# Allegro board pc042b_vsupply5v_07.brd
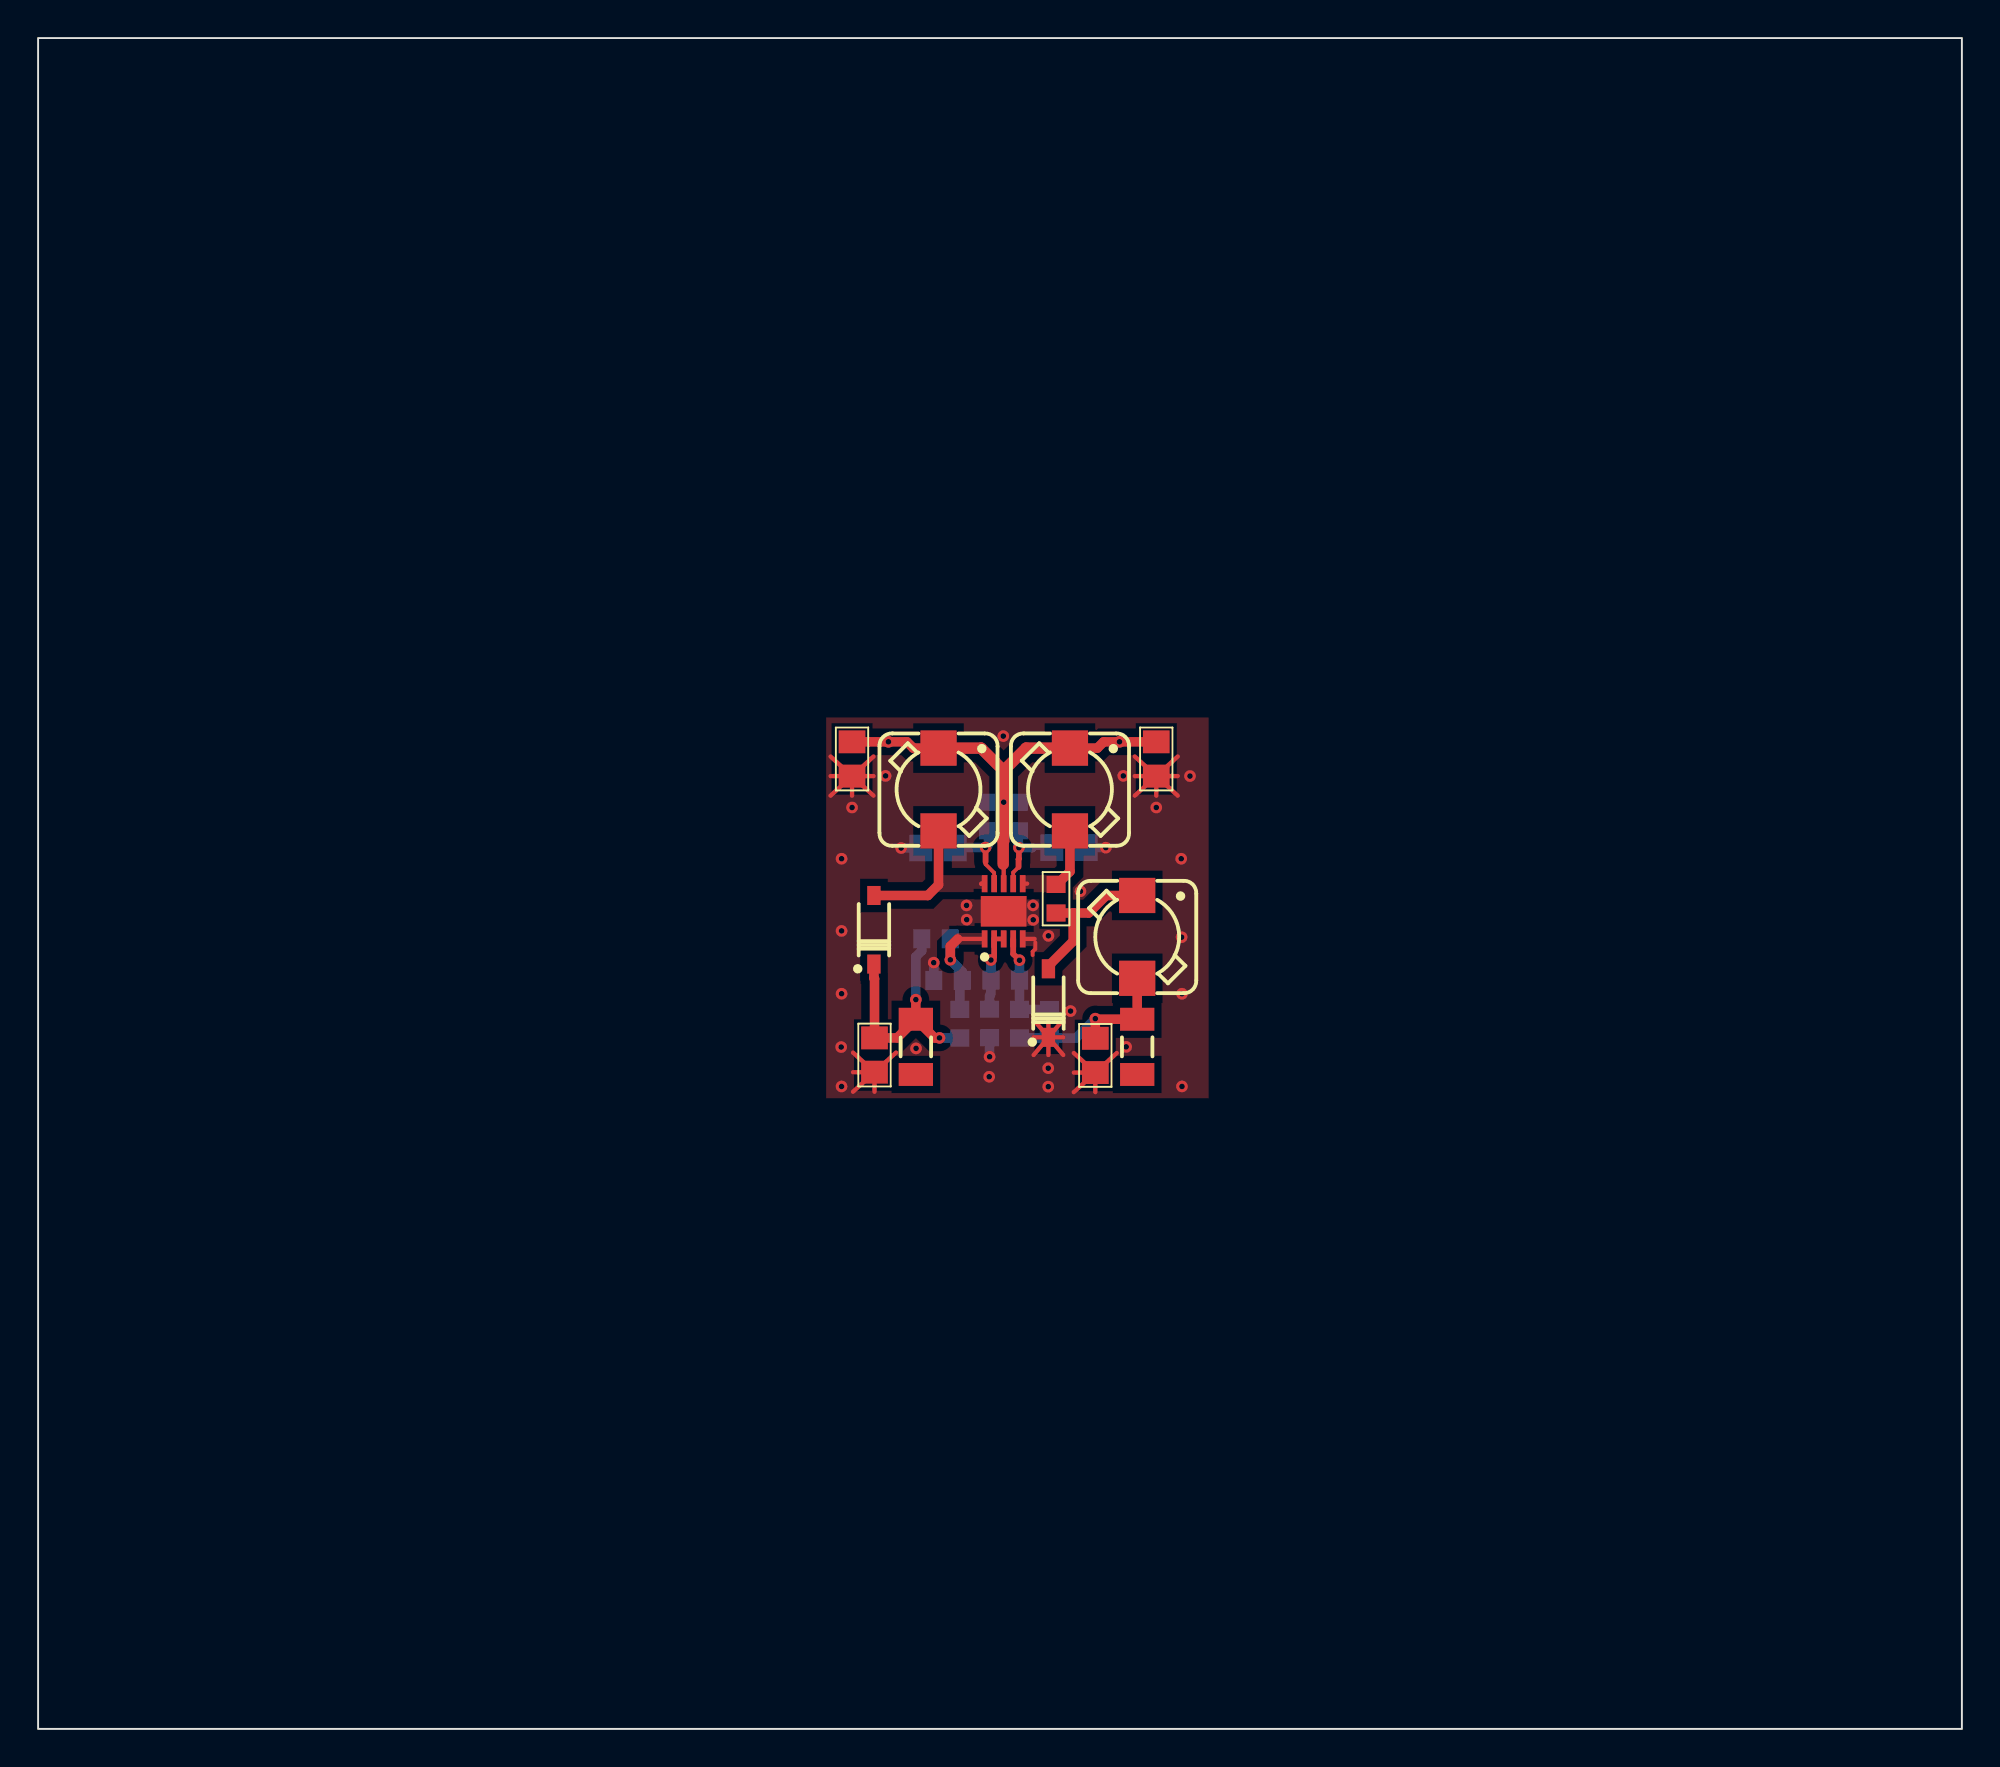
[diagram p0: board, top side]
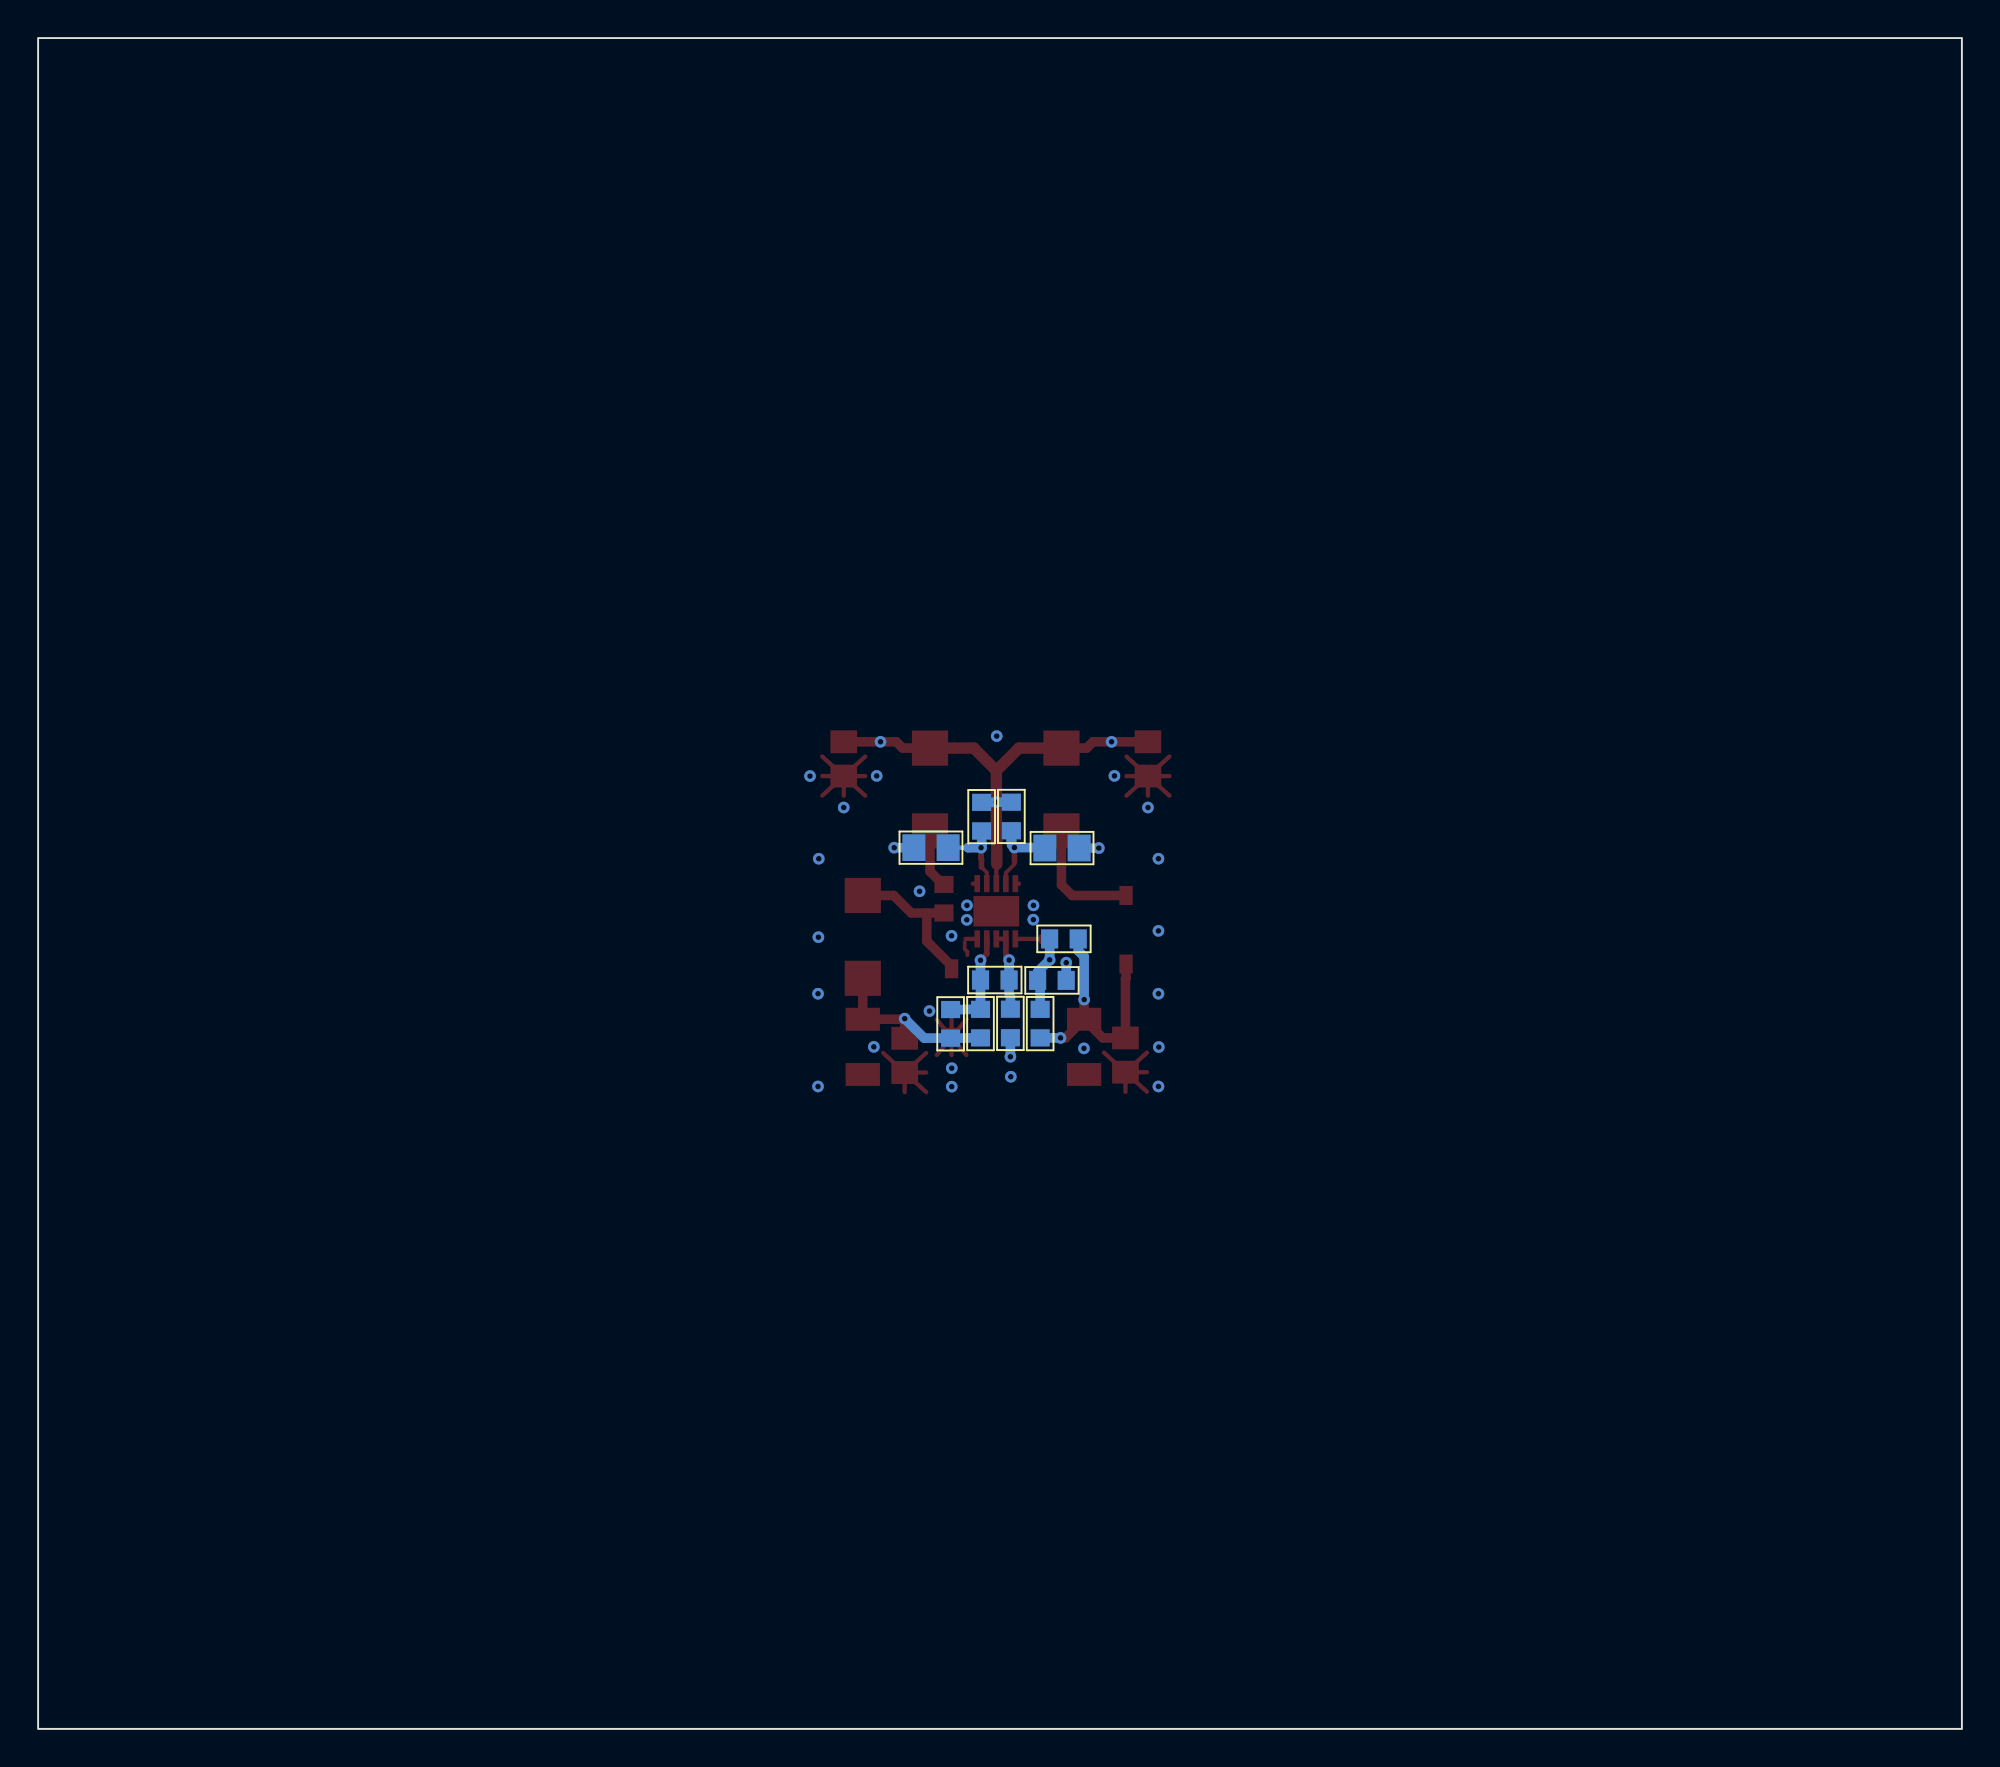
[diagram p1: board, bottom side, seen from below]

Outline 100.99 x 88.8 mm; copper layers: TOP, L2, L3, L4, L5, BOTTOM. Coordinates in mm from the lower left corner of the outline.
Outline path: rectangle 0,0 100.99,88.8

## Placement (name value [footprint] x y rotation side)
C1  4.7uF  [C0805]  58.7 50.94 90 top
C2  330nF  [C0805]  47.24 46.26 0 bottom
C3  330nF  [C0805]  54.12 46.28 180 bottom
C4  100nF  [C0603]  49.95 37.05 90 bottom
C5  1uF  [C0603]  53.44 43.6 270 top
C6  33pF  [C0603]  47.14 41.49 0 bottom
C7  10uF  [C0805]  55.5 35.37 90 top
C8  4.7uF  [C0805]  43.91 35.39 90 top
C9  68pF  [C0603]  53.09 37.03 90 bottom
C14  4.7uF  [C0805]  42.73 50.94 90 top
D1  -  [SOD3715X145N]  43.88 41.97 90 top
D2  -  [SOD3715X145N]  53.04 38.12 90 top
IC1  -  [SON50P300X300X100-11N-R240X160]  50.69 42.94 90 top
L1  10uH  [IND_WURTH_XS]  47.27 49.33 270 top
L2  10uH  [IND_WURTH_XS]  54.17 49.33 270 top
L3  10uH  [IND_WURTH_XS]  57.7 41.59 270 top
L4  -  [INDC3216X130N]  46.08 35.82 270 top
L5  -  [INDC3216X130N]  57.7 35.82 270 top
NOREF  -  []  -47.45 -107.93 0 top
R1  4.7k  [C0603]  51.46 47.91 270 bottom
R2  4.7k  [C0603]  49.9 47.92 270 bottom
R3  20k  [C0603]  50.77 39.33 180 bottom
R4  110k  [C0603]  51.52 37.04 90 bottom
R5  90k9  [C0603]  48.39 37.04 90 bottom
R6  20k  [C0603]  47.77 39.31 0 bottom

## Library data of the parts
C1 C8 C14 = CAPCERSMDCL2: part number: CAPCERSMDCL2_0805-4.7UF,10V; tolerance: +80%-20%
C2 C3 = CAPCERSMDCL2: part number: CAPCERSMDCL2_0805-330NF,50V; tolerance: 10%
C4 = CAPCERSMDCL2: part number: CAPCERSMDCL2_0603-100NF,16V; tolerance: 10%
C5 = CAPCERSMDCL2: part number: CAPCERSMDCL2_0603-1UF,16V; tolerance: 10%
C6 = CAPCERSMDCL1: part number: CAPCERSMDCL1_0603-33PF,50V; tolerance: 5%
C7 = CAPCERSMDCL2: part number: CAPCERSMDCL2_0805-10UF,10V_GEN; tolerance: 10%
C9 = CAPCERSMDCL1: part number: CAPCERSMDCL1_0603-68PF,50V; tolerance: 5%
D1 D2 = DIODE: part number: DIODE_SCHOTTKY_CA-SD101AW
IC1 = LT3471: part number: LT3471EDD#PBF
L1-L3 = INDUCTANCE: part number: INDUCTANCE_XS-10UH_25%
L4 L5 = FERRITE: part number: FERRITE_SMD-7427921,WURTH
R1 R2 = RSMD0603: part number: RSMD0603_1/16W-4K7,5%; tolerance: 5%
R3 R6 = RSMD0603: part number: RSMD0603_1/16W-20K,1%; tolerance: 1%
R4 = RSMD0603: part number: RSMD0603_100MW-110K,0.1%; tolerance: 0.1%
R5 = RSMD0603: part number: RSMD0603_1/16W-90K9,1%; tolerance: 1%

## Footprints (pads in the part's own frame, mm; a bottom-side part is the same pattern mirrored in y, then rotated)
C0603
  rect 0.9x1 smd: 1(-0.75,0) 2(0.75,0)
C0805
  rect 1.2x1.4 smd: 1(-0.9,0) 2(0.9,0)
IND_WURTH_XS
  rect 1.85x1.9 smd: 1(-2.18,0) 2(2.17,0)
INDC3216X130N
  rect 1.2x1.8 smd: 1(-1.45,0) 2(1.45,0)
SOD3715X145N
  rect 1x0.7 smd: A(1.8,0) C(-1.8,0)
SON50P300X300X100-11N-R240X160
  rect 0.9x0.3 smd: 1(-1.45,1) 2(-1.45,0.5) 3(-1.45,0) 4(-1.45,-0.5) 5(-1.45,-1) 6(1.45,-1) 7(1.45,-0.5) 8(1.45,0) 9(1.45,0.5) 10(1.45,1)
  rect 1.6x2.4 smd: 11(0,0)

## Nets
GND_SIGNAL: C1.1(A<0>) C2.1(A<0>) C3.1(A<0>) C4.1(A<0>) C7.1(A<0>) C8.1(A<0>) C14.1(A<0>) D2.C(K<0>) IC1.5(FB2*) IC1.11 R6.1(A<0>)
VIN: C1.2(B<0>) C14.2(B<0>) IC1.8(VIN) L1.1(A<0>) L2.1(A<0>) R1.1(A<0>) R2.1(A<0>)
+VOUT: L4.2(B)
-VOUT: L5.2(B)
UNNAMED_1_CAPCERSMDCL1_I12_B: C6.2(B<0>) IC1.1(FB1*) R5.2(B<0>) R6.2(B<0>)
UNNAMED_1_CAPCERSMDCL1_I13_B: C9.2(B<0>) IC1.4(FB2) R3.1(A<0>) R4.2(B<0>)
UNNAMED_1_CAPCERSMDCL2_I9_B: C2.2(B<0>) IC1.9(SHDN/SS1*) R2.2(B<0>)
UNNAMED_1_CAPCERSMDCL2_I10_B: C3.2(B<0>) IC1.7(SHDN/SS2*) R1.2(B<0>)
UNNAMED_1_CAPCERSMDCL2_I11_A: C5.1(A<0>) IC1.6(SW2) L2.2(B<0>)
UNNAMED_1_CAPCERSMDCL2_I11_B: C5.2(B<0>) D2.A(A<0>) L3.1(A<0>)
UNNAMED_1_CAPCERSMDCL2_I15_B: C6.1(A<0>) C8.2(B<0>) D1.C(K<0>) L4.1(A) R5.1(A<0>)
UNNAMED_1_CAPCERSMDCL2_I17_B: C4.2(B<0>) IC1.2(FB1) IC1.3(VREF) R3.2(B<0>)
UNNAMED_1_CAPCERSMDCL2_I20_B: C7.2(B<0>) C9.1(A<0>) L3.2(B<0>) L5.1(A) R4.1(A<0>)
UNNAMED_1_DIODE_I48_A: D1.A(A<0>) IC1.10(SW1) L1.2(B<0>)

## Via types
v1: diameter 0.61, hole 0.3, TOP to BOTTOM, 42 vias

## Routing (per net, layer and track width the routed paths; a pad name or vN(x,y) marks a point on that pad's centre or on a via; arc(x,y) is an arc through that point)
GND_SIGNAL: length 45.8
  TOP w0.2: 52.35,41.31 52.35,40.96 52.21,40.82 52.21,40.64
  TOP w0.226: 52.26,35.39 D2.C ; D2.C 52.26,37.25 ; D2.C 53.82,37.25 ; D2.C 53.82,36.32 ; D2.C 53.04,35.39 ; D2.C 52.26,36.32 ; D2.C 53.82,35.39 ; D2.C 53.04,37.25 ; 42.78,33.46 C8.1 ; C8.1 42.78,35.52 ; C8.1 42.78,34.49 ; C8.1 45.04,35.52 ; C8.1 43.91,33.46 ; 54.37,34.47 C7.1 ; C7.1 54.37,35.5 ; C7.1 56.63,35.5 ; C7.1 54.37,33.44 ; C7.1 55.5,33.44 ; 58.7,49.01 C1.1 ; C1.1 59.83,50.04 ; C1.1 59.83,49.01 ; C1.1 57.57,49.01 ; C1.1 59.83,51.07 ; C1.1 57.57,51.07 ; C1.1 57.57,50.04 ; 41.6,49.01 C14.1 ; C14.1 41.6,50.04 ; C14.1 42.73,49.01 ; C14.1 41.6,51.07 ; C14.1 43.86,51.07 ; C14.1 43.86,49.01 ; C14.1 43.86,50.04 ; IC1.5 52.31,41.49
  BOTTOM w0.5: R6.1 v1(47.02,40.24) ; C2.1 v1(45.31,46.26) ; C4.1 v1(49.95,35.3) ; C3.1 v1(56.05,46.28)
  vias: v1(42.18,45.7) v1(42.18,41.91) v1(42.18,38.61) v1(42.16,35.81) v1(42.18,33.74) v1(42.73,48.39) v1(44.49,50.05) v1(46.09,35.74) v1(48.74,43.25) v1(48.75,42.5) v1(49.93,34.25) v1(50.67,52.14) v1(52.23,43.25) v1(52.24,42.49) v1(53.04,41.65) v1(53.03,34.7) v1(53.03,33.73) v1(54.2,37.7) v1(54.72,43.99) v1(56.97,50.05) v1(57.12,35.82) v1(58.7,48.39) v1(60.01,45.7) v1(60.03,41.58) v1(60.05,38.61) v1(60.05,33.74) v1(60.47,50.04)
VIN: length 24.7
  TOP w0.226: IC1.8 50.69,45.39 50.66,45.41 ; 50.68,50.33 50.69,50.33
  TOP w0.5: L2.1 55.61,51.51 55.94,51.84 v1(56.77,51.84) C1.2 ; C14.2 v1(44.64,51.84) 45.61,51.84 45.94,51.51 L1.1
  TOP w0.6: 50.68,50.33 49.5,51.51 L1.1 ; L2.1 51.87,51.51 50.69,50.33 v1(50.69,48.67) 50.69,46.64 50.66,46.61 50.66,45.41
  BOTTOM w0.5: R1.1 50.7,48.66 v1(50.69,48.67) R2.1
UNNAMED_1_CAPCERSMDCL1_I12_B: length 6.7
  TOP w0.226: IC1.1 48.28,41.49
  TOP w0.5: 48.28,41.49 47.89,41.1 v1(47.89,40.39)
  BOTTOM w0.5: R5.2 48.39,39.18 R6.2 48.52,39.76 v1(47.89,40.39) C6.2
UNNAMED_1_CAPCERSMDCL1_I13_B: length 5.4
  TOP w0.3: IC1.4 51.19,40.7 v1(51.52,40.37)
  BOTTOM w0.226: 52.27,37.78 52.26,37.79
  BOTTOM w0.5: 52.26,37.79 R4.2 R3.1 v1(51.52,40.37) ; C9.2 52.27,37.78
UNNAMED_1_CAPCERSMDCL2_I9_B: length 4.6
  TOP w0.2: 49.74,45.54 49.74,45.41 50.19,44.96 IC1.9
  TOP w0.3: 49.74,45.54 v1(49.74,46.29)
  BOTTOM w0.226: 48.17,46.29 C2.2
  BOTTOM w0.5: 48.17,46.29 v1(49.74,46.29) 49.89,46.44 49.89,46.65 49.9,46.66 R2.2
UNNAMED_1_CAPCERSMDCL2_I10_B: length 4.6
  TOP w0.2: IC1.7 51.19,44.98 51.47,45.26
  TOP w0.3: v1(51.49,46.28) 51.49,45.7 51.47,45.68 51.47,45.26
  BOTTOM w0.226: 52.17,46.28 52.38,46.28 52.38,46.28 C3.2
  BOTTOM w0.5: 52.17,46.28 v1(51.49,46.28) 51.49,46.32 51.47,46.34 51.47,46.43 51.46,46.44 R1.2
UNNAMED_1_CAPCERSMDCL2_I11_A: length 3.4
  TOP w0.226: IC1.6 51.92,44.39
  TOP w0.3: 53.49,44.35 C5.1
  TOP w0.5: L2.2 54.17,45.03 53.49,44.35
UNNAMED_1_CAPCERSMDCL2_I11_B: length 8.1
  TOP w0.5: D2.A 53.04,40.07 54.34,41.37 54.34,42.85 ; 54.34,42.85 C5.2 ; 54.34,42.85 55.15,42.85 56.07,43.77 L3.1
UNNAMED_1_CAPCERSMDCL2_I15_B: length 13.5
  TOP w0.5: v1(46.08,38.3) L4.1 ; L4.1 47.06,36.29 v1(47.32,36.29) ; L4.1 45.1,36.29 C8.2 43.91,39.4 43.88,39.43 D1.C
  BOTTOM w0.5: R5.1 v1(47.32,36.29) ; v1(46.08,38.3) 46.08,40.56 46.39,40.87 C6.1
UNNAMED_1_CAPCERSMDCL2_I17_B: length 4.3
  TOP w0.25: IC1.2 IC1.3
  TOP w0.3: v1(50.02,40.38) 50.19,40.55 IC1.2
  BOTTOM w0.3: 50.02,38.59 49.95,38.52
  BOTTOM w0.5: 49.95,38.52 C4.2 ; 50.02,38.59 R3.2 v1(50.02,40.38)
UNNAMED_1_CAPCERSMDCL2_I20_B: length 9.8
  TOP w0.3: 55.64,37.27 55.5,37.13 v1(55.5,37.3)
  TOP w0.5: L3.2 L5.1 55.64,37.27 ; 55.5,37.13 C7.2
  BOTTOM w0.226: 52.26,36.29 52.27,36.28
  BOTTOM w0.5: 52.27,36.28 C9.1 54.48,36.28 v1(55.5,37.3) ; R4.1 52.26,36.29
UNNAMED_1_DIODE_I48_A: length 6.6
  TOP w0.226: 49.51,44.38 49.52,44.39 IC1.10
  TOP w0.5: L1.2 47.27,44.33 46.71,43.77 D1.A

## Copper pours and planes (outline as drawn; the poured copper is in the pictures)
GND_SIGNAL on TOP: 41.37,53.12 41.37,33.12 61.45,33.12 61.45,53.12
GND_SIGNAL on TOP: 49,43.7 49,42.17 52.39,42.17 52.39,43.7
UNNAMED_1_CAPCERSMDCL2_I11_A on TOP: 51.54,44.84 51.54,43.94 53.93,43.94 53.93,44.84
UNNAMED_1_DIODE_I48_A on TOP: 47.2,44.84 47.2,43.95 49.83,43.95 49.83,44.84

Small or netless copper shapes (teardrops, artwork), in the pictures only: 2 on TOP

## Text on the board
PAGE_OUTLINE: D.Cussans | S.Nash | 3.3V --> +/- 5V DC-DC supply | PC042b_vsupply5v | 1/1
